# Altium PCB PCB_Rpi4_New_Rev2.PcbDoc
Units mm, origin at the board's own origin, x right, y up, seen from the top; angles counter-clockwise.
Board outline 38.42 x 84.2 mm, 2 copper layers (Top Layer, Bottom Layer); 15 components, 17 nets, 85 pads, 17 vias.
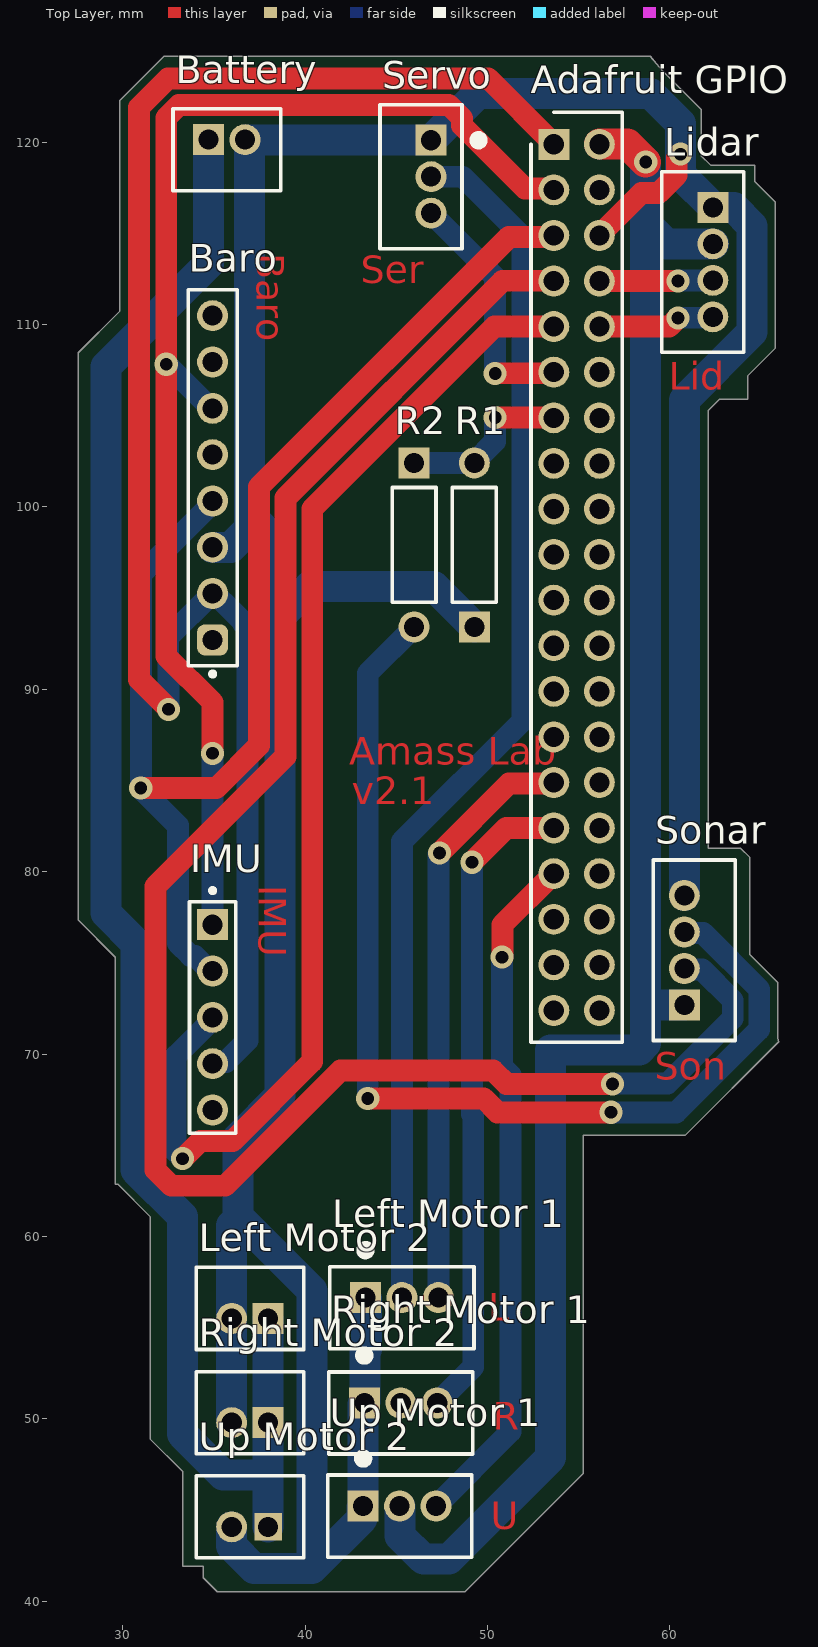
[diagram p0: Top Layer view]
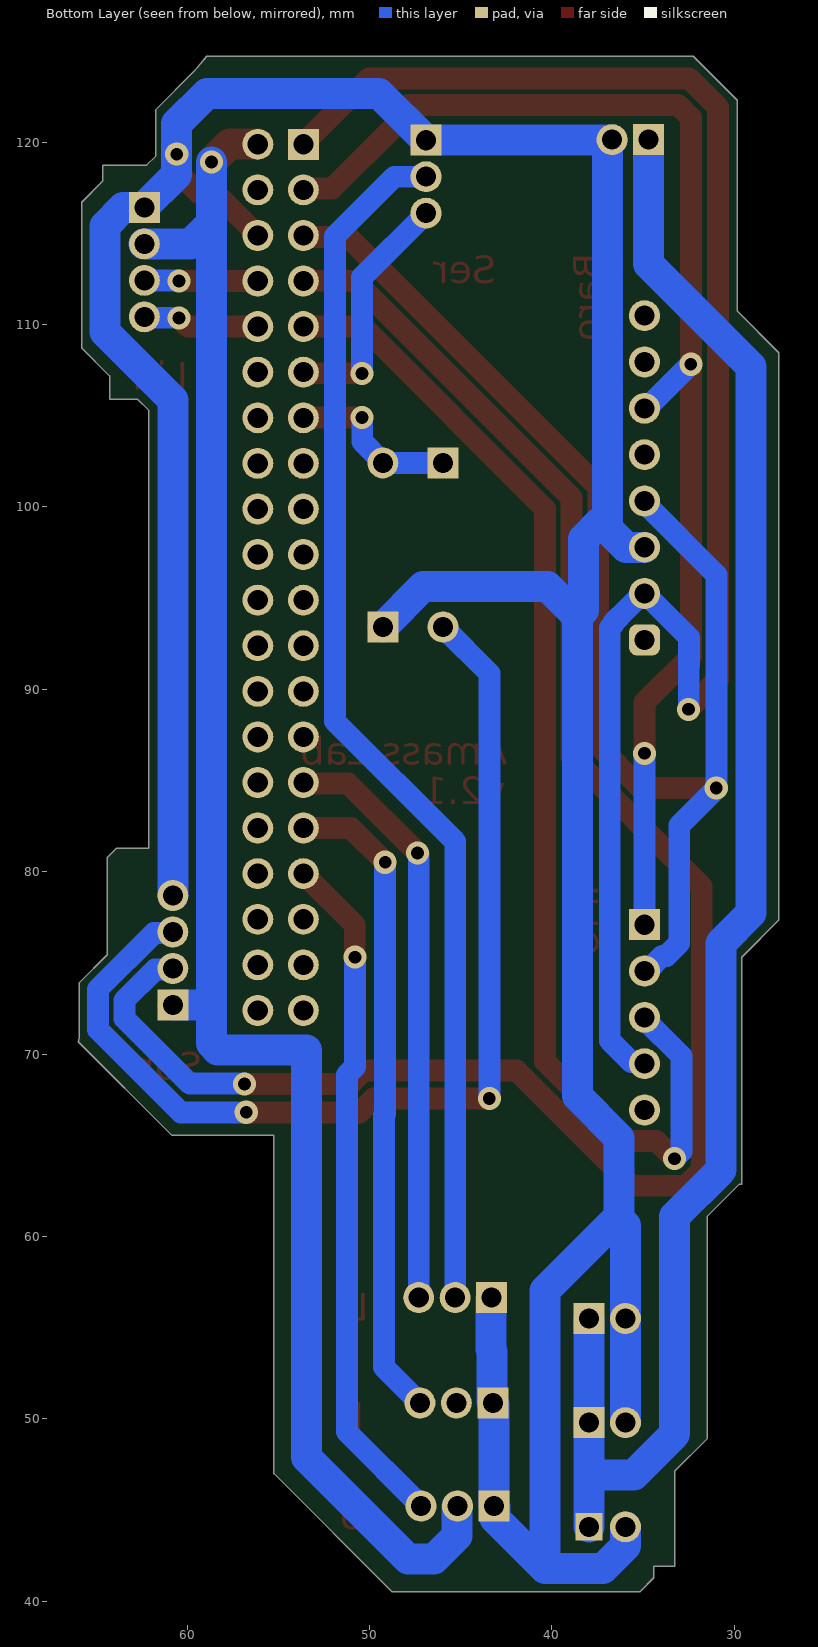
[diagram p1: Bottom Layer view, seen from below]

## Layer stack, top to bottom
Top Solder: solder mask 0.0102, Solder Resist, Dk 3.5
Top Layer: signal copper 0.0356
Dielectric 1: dielectric 0.32, FR-4, Dk 4.8
Bottom Layer: signal copper 0.0356
Bottom Solder: solder mask 0.0102, Solder Resist, Dk 3.5

## Board outline
65.786,116.713 65.786,108.712 64.262,107.188 64.262,105.918 62.738,105.918 62.103,105.283 62.103,81.28 63.881,81.28 64.389,80.772 64.389,75.438 65.913,73.914 65.913,70.866 65.977,70.675 60.833,65.532 55.245,65.532 55.245,46.99 48.768,40.513 35.179,40.513 34.417,41.275 34.417,41.91 33.274,41.91 33.274,47.117 31.496,48.895 31.496,61.087 29.718,62.865 29.591,62.865 29.591,75.311 27.559,77.343 27.559,108.458 29.845,110.744 29.845,122.301 32.258,124.714 58.928,124.714 59.627,123.888 61.722,121.793 61.722,119.253 62.23,118.745 64.643,118.745 64.643,117.856

## Design rules (kind name [scope] priority, off if disabled: settings)
Clearance [All] p1: gap=0.254 ignorepadtopadclearanceinfootprint=FALSE
PolygonConnect [All] p1: connectstyle=Relief reliefconductorwidth=0.254 reliefentries=4 polygonreliefangle="90 Angle" airgapwidth=0.254
RoutingVias [All] p1: holewidth=0.7 width=1.5 viastyle="Through Hole" minholewidth=0.7 minwidth=1.5 maxholewidth=0.7 maxwidth=1.5
SolderMaskExpansion [All] p1: expansion=0.102 istentingtop=FALSE
Width [All] p1: maxlimit=1.2 minlimit=1.2 preferedwidth=1.2 minimp=50.000000 maximp=50.000000 favimp=50.000000
30 further rules are at their usual default settings.

## Classes and differential pairs
component class PCB_Rpi4_New: "Adafruit GPIO" Baro Battery IMU "Left Motor 1" "Left Motor 2" Lidar R1 R2 "Right Motor 1" "Right Motor 2" Servo Sonar "Up Motor 2"

## Components (designator, comment, footprint, x,y, rotation, side; value= is the part's Value field where it differs from the comment)
"Adafruit GPIO" "1979" RHDR40W60P250_2X20_5100X500X23 53.634,119.89 r270 top
Baro "61300811121" 61300811121 34.925,101.6 r90 top (schematic designator P?)
Battery "B2B-PH-K-S(LF)(SN)" JST-B2B-PH-K-S_V#1 35.703,119.592 r0 top
IMU "90120-0125" FP-90120-0125-MFG 34.925,72.009 r270 top (schematic designator J?)
"Left Motor 1" "B3B-PH-K-S(LF)(SN)" JST-B3B-PH-K-S-3_V 45.307,56.092 r0 top
"Left Motor 2" "B2B-PH-K-S(LF)(SN)" JST-B2B-PH-K-S_V#1 36.973,56.049 r180 top
Lidar "B4B-PH-K-S(LF)(SN)" JST-B4B-PH-K-S_V 61.807,113.427 r270 top
R1 "470" RESA60-630X240 49.276,97.917 r90 top
R2 "330" RESA60-630X240 45.974,97.917 r270 top
"Right Motor 1" "B3B-PH-K-S(LF)(SN)" JST-B3B-PH-K-S-3_V 45.244,50.314 r0 top
"Right Motor 2" "B2B-PH-K-S(LF)(SN)" JST-B2B-PH-K-S_V#1 36.973,50.334 r180 top
Servo "B3B-PH-K-S(LF)(SN)" JST-B3B-PH-K-S-3_V 46.355,118.11 r270 top
Sonar "B4B-PH-K-S(LF)(SN)" JST-B4B-PH-K-S_V 61.341,75.692 r90 top
"Up Motor 1" "B3B-PH-K-S(LF)(SN)" JST-B3B-PH-K-S-3_V 45.18,44.662 r0 top
"Up Motor 2" "B2B-PH-K-S(LF)(SN)" JST-B2B-PH-K-S_V#2 36.973,44.619 r180 top

## Footprints (in the part's own frame and the unit in brackets; to place one, negate y for a bottom-side part, rotate by r counter-clockwise, add the part's x,y. Pads: shape width x height; smd on the part's side, far side on the other; paste and mask are expansions set on the pad)
61300811121 [mm] "Pin Header, pitch 2.54 mm, THT, Vertical, single row, 8p"
  rrect50% 1.7x1.7 hole 1.1: 1(-8.89,0)
  round 1.7 hole 1.1: 2(-6.35,0) 3(-3.81,0) 4(-1.27,0) 5(1.27,0) 6(3.81,0) 7(6.35,0) 8(8.89,0)
  silkscreen extent -10.88,-1.35 10.31,1.35, body extent -10.16,-1.27 10.16,1.27, height 8.57
FP-90120-0125-MFG [mm]
  rect 1.7x1.7 hole 1.1 paste-2539.97 mask+0: 1(-5.08,0)
  round 1.7 hole 1.1 paste-2539.97 mask+0: 2(-2.54,0) 3(0,0) 4(2.54,0) 5(5.08,0)
  silkscreen extent -7.07,-1.27 6.35,1.27, body extent -6.45,-1.37 6.45,1.37, height 0.25
JST-B2B-PH-K-S_V#1 [mm] "Connector, 2-Leads, Body 5.9x4.5mm, Pitch 2mm"
  rect 1.7x1.7 hole 1.1: 1(-1,0.55)
  round 1.7 hole 1.1: 2(1,0.55)
  silkscreen extent -2.95,-2.25 2.95,2.25, body extent -2.95,-2.25 2.95,2.25, height 6
JST-B2B-PH-K-S_V#2 [mm] "Connector, 2-Leads, Body 5.9x4.5mm, Pitch 2mm"
  rect 1.5x1.5 hole 1.1: 1(-1,0.55)
  round 1.7 hole 1.1: 2(1,0.55)
  silkscreen extent -2.95,-2.25 2.95,2.25, body extent -2.95,-2.25 2.95,2.25, height 6
JST-B3B-PH-K-S-3_V [mm] "Connector, 3-Leads, Body 7.9x4.5mm, Pitch 2mm"
  rect 1.7x1.7 hole 1.1: 1(-2,0.55)
  round 1.7 hole 1.1: 2(0,0.55) 3(2,0.55)
  silkscreen extent -3.95,-2.25 3.95,3.4, body extent -3.95,-2.25 3.95,2.25, height 6
JST-B4B-PH-K-S_V [mm] "Connector, 4-Leads, Body 9.9x4.5mm, Pitch 2mm"
  rect 1.7x1.7 hole 1.1: 1(-3,0.55)
  round 1.7 hole 1.1: 2(-1,0.55) 3(1,0.55) 4(3,0.55)
  silkscreen extent -4.95,-2.25 4.95,2.25, body extent -4.95,-2.25 4.95,2.25, height 6
RESA60-630X240 [mm] "Axial Resistor, 2-Leads, Dia 2.4mm, Body Length 6.3mm"
  rect 1.7x1.7 hole 1.1: 1(-4.5,0)
  round 1.7 hole 1.1: 2(4.5,0)
  silkscreen extent -3.15,-1.2 3.15,1.2, body extent -3.15,-1.2 3.15,1.2, height 2.4
RHDR40W60P250_2X20_5100X500X23 [mm]
  rect 1.7x1.7 / inner round 1.7 / far side rect 1.7x1.7 hole 1.1: 1(0,0)
  round 1.7 hole 1.1: 2(0,2.5) 3(2.5,0) 4(2.5,2.5) 5(5,0) 6(5,2.5) 7(7.5,0) 8(7.5,2.5) 9(10,0) 10(10,2.5) 11(12.5,0) 12(12.5,2.5) 13(15,0) 14(15,2.5) 15(17.5,0) 16(17.5,2.5) 17(20,0) 18(20,2.5) 19(22.5,0) 20(22.5,2.5) 21(25,0) 22(25,2.5) 23(27.5,0) 24(27.5,2.5) 25(30,0) 26(30,2.5) 27(32.5,0) 28(32.5,2.5) 29(35,0) 30(35,2.5) 31(37.5,0) 32(37.5,2.5) 33(40,0) 34(40,2.5) 35(42.5,0) 36(42.5,2.5) 37(45,0) 38(45,2.5) 39(47.5,0) 40(47.5,2.5)
  silkscreen extent -1.75,-1.25 49.25,3.75

## Part data
"Adafruit GPIO": library part CMP-002-00071-1, "Stacking Header for Pi A+/B+/Pi 2/Pi 3 - 2x20 Extra Tall Header", Case/Package=None, Check_prices=https://www.snapeda.com/parts/1979/Adafruit+Industries+LLC/view-part/?ref=eda, Component Type=Standard, Design Item ID=1979, MF="Adafruit Industries", MP=1979, Pins=40, SnapEDA_Link=https://www.snapeda.com/parts/1979/Adafruit+Industries+LLC/view-part/?ref=snap, Source=1979.SchLib
Baro: library part CMP-1502-01076-3, Color=Black, Contact Resistance=20mΩ, Current Rating=3A, Max Operating Temperature=105°C, Min Operating Temperature=-40°C, Operating Supply Voltage=250V, Connector Type="Male Pin", Contact Material=Copper, Contact Mating Length=5.9944mm, Contact Plating=Gold, Gender=Male, Height=8.54mm, Lead Pitch=2.54mm, Mount="Through Hole", NexarPartId=32855533, Number of Contacts=8, Number of Pins=8, Number of Positions=8, Number of Rows=1, Orientation=Vertical, Packaging=Bulk, Pitch=2.54mm, REACH SVHC=Unknown, RoHS=Compliant, Termination=Solder, Voltage Rating=250V
Battery "Left Motor 2" "Right Motor 2" "Up Motor 2": library part CMP-2000-05162-1, "Male Header, Pitch 2 mm, 1 x 2 Position, Height 6 mm, Tail Length 3.4 mm, -25 to 85 degC, RoHS, Bulk", Manufacturer=JST, Datasheet URL=http://datasheet.octopart.com/B2B-PH-K-S%28LF%29%28SN%29-JST-datasheet-8324864.pdf, Datasheet Version=Nov-08, Manufacturer URL=http://www.jst.com/home2.html, No of Positions=2, Pitch=2mm, Style/Orientation=StraightHeader/Plug, Termination=Crimp, Type=ShroudedHeader
IMU: library part CMP-00257-00655425-1, "90120-0125 2.54mm Pitch C-Grid III Header, Single Row, Vertical, 5 Circuits, Tin (Sn) Plating", Contact Resistance=20mΩ, Current Rating=3A, Housing Color=Black, Manufacturer Lifecycle Status=ACTIVE, Max Operating Temperature=125°C, Max Voltage Rating (DC)=350.35kV, Min Operating Temperature=-55°C, Voltage Rating=350V, Contact Gender=Male, Contact Material=Brass, Contact Plating=Tin, Country of Origin=SK, Gender=Male, Glow Wire Compliant=Non-compliant, Housing Material=Polyester, Lead Free="Lead Free", Lead Length=2.9mm, Lead Pitch=2.54mm, Lifecycle Status=Production, Mating Post Length=6.75mm, Mount="Through Hole", NexarPartId=655425, Number of Circuits=5, Number of Contacts=5, Number of Pins=5, Number of Positions=5, Number of Rows=1, Orientation=Vertical, Packaging=Bulk, Pitch=2.54mm, Plating=Tin, Radiation Hardening=No, REACH SVHC="No SVHC", RoHS=Compliant, Schedule B=8536694040, Termination=Solder, Voltage Rating (AC)=350V
"Left Motor 1" "Right Motor 1" Servo "Up Motor 1": library part CMP-2000-05164-1, "Male Header, Pitch 2 mm, 1 x 3 Position, Height 6 mm, Tail Length 3.4 mm, -25 to 85 degC, RoHS, Bulk", Manufacturer=JST, Datasheet URL=https://datasheet.ciiva.com/11746/0900766b80826550-11746939.pdf, Datasheet Version=Oct-06, Manufacturer URL=http://www.jst.com/home2.html, No of Positions=3, Pitch=2mm, Style/Orientation=StraightHeader/Plug, Termination=Crimp, Type=ShroudedHeader
Lidar Sonar: library part CMP-2000-05165-1, "Male Header, Pitch 2 mm, 1 x 4 Position, Height 6 mm, Tail Length 3.4 mm, -25 to 85 degC, RoHS, Bulk", Manufacturer=JST, Datasheet URL=http://datasheet.octopart.com/B4B-PH-K-S%28LF%29%28SN%29-JST-datasheet-10558886.pdf, Datasheet Version=Apr-09, Manufacturer URL=http://www.jst.com/home2.html, No of Positions=4, Pitch=2mm, Style/Orientation=StraightHeader/Plug, Termination=Crimp, Type=ShroudedHeader
R1 R2: library part CMP-1659-00073-1, "Axial Resistor, 100 KOhm, +/- 1%, 0.25 W, -55 to 155 degC, 2-Pin THD, RoHS, Bulk", Case\Package=Axial, Max Operating Temperature="155 degC", Min Operating Temperature="-55 degC", Package Quantity=200, Power Rating="250 mW", Resistance="475 Ohm", Tolerance=1%, Voltage Rating="250 V", ComponentLink1Description="Manufacturer URL", ComponentLink1URL=http://www.yageo.com/, ComponentLink2Description=Datasheet, ComponentLink2URL=http://www.yageo.com/documents/recent/Yageo%20LR_MFR_2013.pdf, DatasheetVersion=Apr-13, Length="0.248 inch", Mount="Through Hole", PackageDescription="2-Pin Axial Lead, Dia 2.4 mm, Body Length 6.3 mm", PackageReference=MFR-25, Packaging=Bulk, RoHSCompliant=true

## Via types
v1: diameter 1.27, hole 0.7, Top Layer to Bottom Layer, 17 vias

## Nets (pads, with @x,y where several pads share a name; then routed paths per layer and width w, separated by ;. In a path a pad name is that pad's centre, name@x,y a point inside that pad or via, vN(x,y) a via of type N, cw(c..) or ccw(c..) an arc to the next point about the centre after c; other vN are vias at no path point)
"NetAdafruit GPIO_1": "Adafruit GPIO.1" Baro.2 IMU.4 | length 93.8
  Top Layer w1.2: v1(32.512,88.9) 32.512,88.919 30.896,90.535 30.896,121.911 32.486,123.501 50.035,123.501 53.634,119.902
  Bottom Layer w1.2: v1(32.512,88.9) 32.499,88.913 32.499,91.332 32.49,91.341 32.49,92.849 34.892,95.25 35.042,95.25 35.878,94.414 35.88,94.414 36.629,93.665 36.629,93.579 36.83,93.378 36.83,70.739 35.656,69.565 35.021,69.565 IMU.4
"NetAdafruit GPIO_2": "Adafruit GPIO.2" "Up Motor 1.2" Lidar.2 Sonar.1 | length 98.1
  Top Layer w1.7: 56.134,119.902 57.684,119.902 v1(58.674,118.912)
  Bottom Layer w1.2: 45.18,45.212 45.199,45.193 ; Lidar.2@62.383,114.427 Lidar.2@62.399,114.411
  Bottom Layer w1.7: 45.199,45.193 45.199,43.574 46.476,42.297 47.885,42.297 53.467,47.879 53.467,70.231 58.33,70.231 58.674,70.575 58.674,72.692 ; v1(58.674,118.912) 58.674,115.57 ; Sonar.1 58.674,72.692 ; Lidar.2@62.383,114.427 Lidar.2 59.817,114.427 58.674,115.57 ; 58.674,72.692 58.674,107.208 58.674,115.57
"NetAdafruit GPIO_3": "Adafruit GPIO.3" Baro.6 IMU.1 | length 72.6
  Top Layer w1.2: v1(34.925,86.487) 34.925,89.281 32.385,91.821 v1(32.385,107.823) 32.385,121.344 33.088,122.047 47.876,122.047 48.609,121.314 48.609,120.914 52.049,117.474 53.562,117.474 53.634,117.402 53.58,117.348
  Bottom Layer w1.2: v1(32.385,107.823) 32.404,107.823 34.817,105.41 Baro.6 ; IMU.1 v1(34.925,86.487)
"NetAdafruit GPIO_5": "Adafruit GPIO.5" Baro.4 IMU.2 | length 72.9
  Top Layer w1.2: v1(30.988,84.582) 35.126,84.582 37.465,86.921 37.465,101.092 51.179,114.806 53.538,114.806 53.634,114.902 ; IMU.2@34.858,74.616 IMU.2
  Bottom Layer w1.2: IMU.2 34.79,74.549 33.954,75.385 33.721,75.385 33.02,76.086 33.02,82.531 30.988,84.563 30.988,96.285 34.925,100.222 Baro.4
"NetAdafruit GPIO_6": "Adafruit GPIO.6" "Left Motor 1.1" "Left Motor 2.2" "Right Motor 1.1" "Right Motor 2.2" "Up Motor 1.1" "Up Motor 2.2" Baro.3 Battery.2 Lidar.1 R1.1 Servo.1 Sonar.4 | length 209.5
  Top Layer w1.2: 56.134,114.902 58.44,117.208 59.38,117.208 60.378,118.206 60.378,119.127 60.579,119.328 v1(60.579,119.347)
  Bottom Layer w1.2: Battery.2 Battery.2@36.719,120.126 ; 43.13,45.162 43.18,45.212 ; 43.18,50.8 43.243,50.863 ; Servo.1@46.889,120.126 Servo.1 ; v1(60.579,119.347) v1@60.592,119.334 ; 60.791,81.365 60.96,81.534
  Bottom Layer w1.7: Baro.3 35.941,97.79 37.338,99.187 38.283,98.242 38.283,94.324 38.608,93.999 ; 35.973,44.069 35.973,43.008 37.198,41.783 40.386,41.783 ; 35.973,49.784 35.973,55.499 35.973,60.586 ; 36.322,60.586 36.322,65.405 38.608,67.691 38.608,93.999 ; 36.322,61.087 40.386,57.023 40.386,41.783 ; 36.957,98.806 36.957,119.888 36.719,120.126 37.338,120.126 Servo.1@46.889,120.126 ; 43.13,45.162 43.13,44.527 40.386,41.783 ; 43.18,45.212 43.18,50.8 ; 43.243,50.863 43.29,50.91 43.29,53.721 43.353,53.785 43.353,56.596 43.307,56.642 ; Servo.1 49.477,122.682 58.928,122.682 60.579,121.031 v1(60.579,119.347) ; R1.1 47.062,95.631 40.24,95.631 38.608,93.999 ; v1@60.592,119.334 60.592,118.218 62.399,116.411 63.52,116.411 64.516,115.415 64.516,109.601 60.791,105.876 60.791,81.365 Sonar.4
"NetAdafruit GPIO_7": "Adafruit GPIO.7" Sonar.2 | length 100.3
  Top Layer w1.2: 53.634,112.402 50.831,112.402 38.919,100.49 38.919,86.319 31.785,79.185 31.785,63.645 32.657,62.773 35.619,62.773 41.934,69.088 50.316,69.088 51.043,68.361 v1(56.861,68.361)
  Bottom Layer w1.2: v1(56.861,68.361) 56.874,68.374 59.865,68.374 63.447,71.956 63.447,72.951 61.763,74.635 60.848,74.635 Sonar.2
"NetAdafruit GPIO_8": "Adafruit GPIO.8" Lidar.3 | length 6.2
  Top Layer w1.2: 56.144,112.392 60.449,112.392 v1(60.452,112.395)
  Bottom Layer w1.2: v1(60.452,112.395) 60.465,112.408 62.338,112.408 Lidar.3
"NetAdafruit GPIO_9": "Adafruit GPIO.9" IMU.3 | length 65.8
  Top Layer w1.2: v1(33.274,64.262) 33.293,64.262 34.256,65.225 36.015,65.225 40.386,69.596 40.386,99.9 50.388,109.902 53.634,109.902
  Bottom Layer w1.2: v1(33.274,64.262) 33.274,64.281 32.893,64.662 32.893,69.882 34.925,71.914 IMU.3
"NetAdafruit GPIO_10": "Adafruit GPIO.10" Lidar.4 | length 6.5
  Top Layer w1.2: 56.146,109.89 59.96,109.89 60.433,110.363 v1(60.452,110.363)
  Bottom Layer w1.2: v1(60.452,110.363) 60.465,110.376 62.332,110.376 Lidar.4@62.383,110.427
"NetAdafruit GPIO_11": "Adafruit GPIO.11" Servo.3 | length 13.5
  Top Layer w1.2: v1(50.419,107.315) 50.434,107.33 53.562,107.33 53.634,107.402
  Bottom Layer w1.2: Servo.3 50.419,112.596 v1(50.419,107.315)
"NetAdafruit GPIO_13": "Adafruit GPIO.13" R1.2 R2.1 | length 9.5
  Top Layer w1.2: v1(50.419,104.902) 53.634,104.902
  Bottom Layer w1.2: R2.1 R1.2 49.276,102.458 50.406,103.587 50.406,104.889 v1(50.419,104.902)
"NetAdafruit GPIO_29": "Adafruit GPIO.29" "Left Motor 1.3" | length 32.3
  Top Layer w1.2: v1(47.371,81.026) 51.175,84.83 53.562,84.83 53.634,84.902
  Bottom Layer w1.2: 47.307,56.642 47.307,80.943 47.371,81.007 v1(47.371,81.026)
"NetAdafruit GPIO_31": "Adafruit GPIO.31" "Right Motor 1.3" | length 35.8
  Top Layer w1.2: v1(49.149,80.518) 51.028,82.397 53.629,82.397 53.634,82.402
  Bottom Layer w1.2: 47.244,50.863 49.215,52.835 49.215,66.634 49.149,66.7 v1(49.149,80.518)
"NetAdafruit GPIO_33": "Adafruit GPIO.33" "Up Motor 1.3" | length 37.7
  Top Layer w1.2: v1(50.8,75.311) 50.813,75.324 50.813,77.081 53.634,79.902
  Bottom Layer w1.2: 47.18,45.212 51.251,49.283 51.251,68.849 50.8,69.3 v1(50.8,75.311)
NetBattery_1: "Left Motor 2.1" "Right Motor 2.1" "Up Motor 2.1" Battery.1 | length 92.1
  Bottom Layer w1.7: Battery.1 34.703,113.316 29.083,107.696 29.083,77.724 30.734,76.073 30.734,63.627 33.274,61.087 33.274,49.149 35.496,46.926 37.973,46.926 ; 37.973,44.069 37.973,46.926 ; 37.973,55.499 37.973,49.784 37.973,46.926
"NetLeft Motor 1_2": "Left Motor 1.2" Servo.2 | length 67.3
  Bottom Layer w1.2: 45.307,56.642 45.307,81.651 51.908,88.252 51.908,114.843 48.641,118.11 Servo.2
NetR2_2: R2.2 Sonar.3 | length 58.2
  Top Layer w1.2: v1(43.434,67.564) 49.784,67.564 50.546,66.802 v1(56.769,66.802)
  Bottom Layer w1.2: v1(43.434,67.564) 43.434,90.877 R2.2 ; v1(56.769,66.802) 60.349,66.802 64.901,71.354 64.901,73.553 61.82,76.635 60.848,76.635 Sonar.3
pads on no net: "Adafruit GPIO.4" "Adafruit GPIO.12" "Adafruit GPIO.14" "Adafruit GPIO.15" "Adafruit GPIO.16" "Adafruit GPIO.17" "Adafruit GPIO.18" "Adafruit GPIO.19" "Adafruit GPIO.20" "Adafruit GPIO.21" "Adafruit GPIO.22" "Adafruit GPIO.23" "Adafruit GPIO.24" "Adafruit GPIO.25" "Adafruit GPIO.26" "Adafruit GPIO.27" "Adafruit GPIO.28" "Adafruit GPIO.30" "Adafruit GPIO.32" "Adafruit GPIO.34" "Adafruit GPIO.35" "Adafruit GPIO.36" "Adafruit GPIO.37" "Adafruit GPIO.38" "Adafruit GPIO.39" "Adafruit GPIO.40" "Right Motor 1.2" Baro.1 Baro.5 Baro.7 Baro.8 IMU.5
copper on no net: | length 0.1
  Top Layer w1.2: 53.562,72.474 53.634,72.402

## Other copper
Top Layer:
  text "Baro" at 37.338,113.919 h1.52 r270
  text "Ser" at 43.053,112.268 h1.52
  text "Lid" at 59.944,106.426 h1.52
  text "Amass Lab" at 42.418,85.852 h1.52
  text "v2.1" at 42.545,83.693 h1.52
  text "IMU" at 37.465,79.248 h1.52 r270
  text "Son" at 59.182,68.58 h1.52
  text "L" at 50.038,55.372 h1.52
  text "R" at 50.292,49.403 h1.52
  text "U" at 50.165,43.942 h1.52